# Altium PCB RPI Arduino Shied.PcbDoc
Units mm, origin at the board's own origin, x right, y up, seen from the top; angles counter-clockwise.
Board outline 65 x 60 mm, 2 copper layers (Top Layer, Bottom Layer); 6 components, 58 nets, 86 pads, 0 vias.
Unrouted connection lines stored in the file: 17.
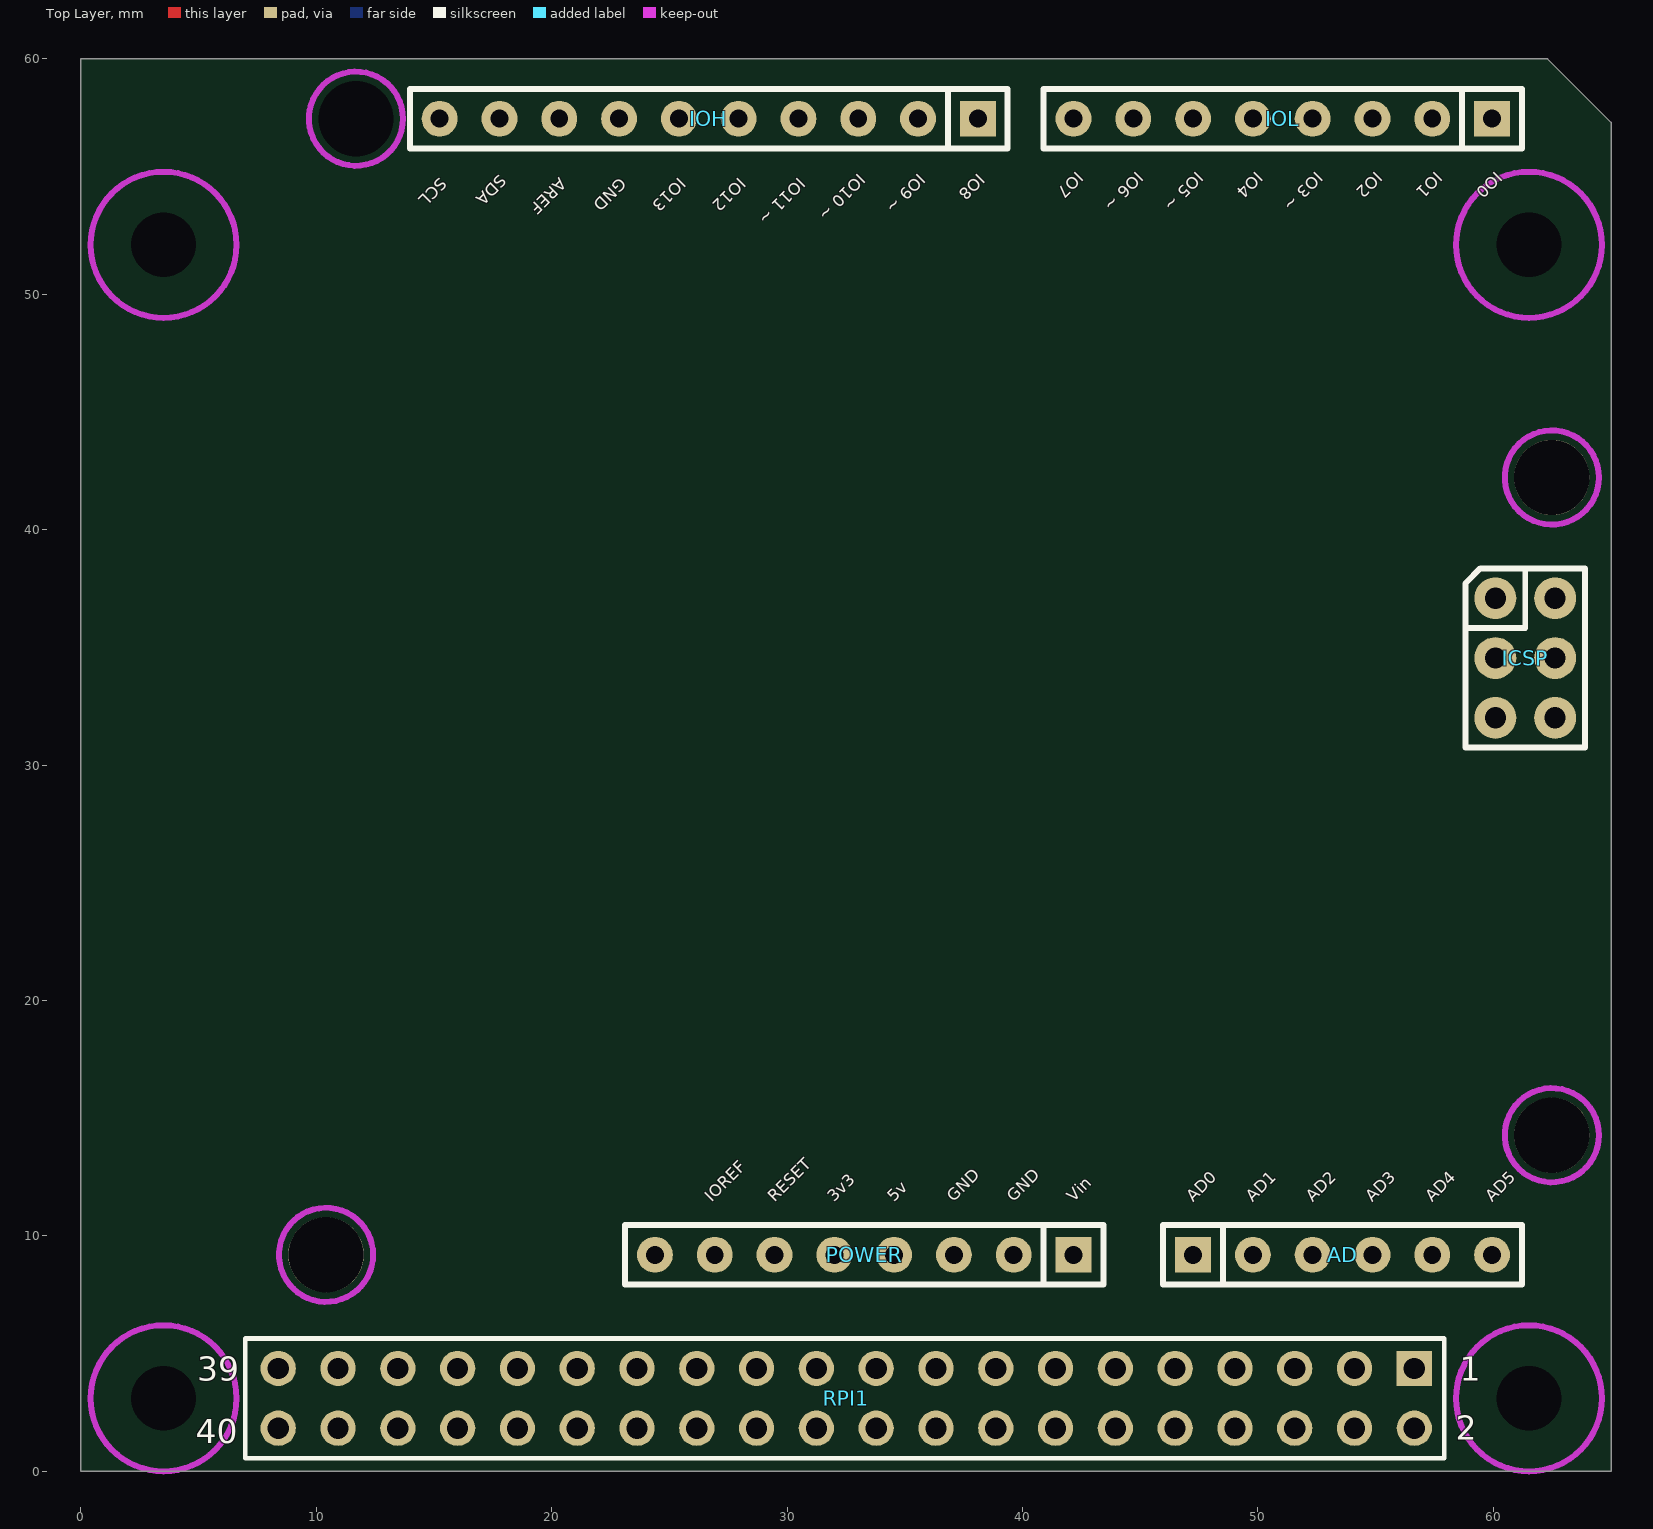
[diagram p0: Top Layer view]
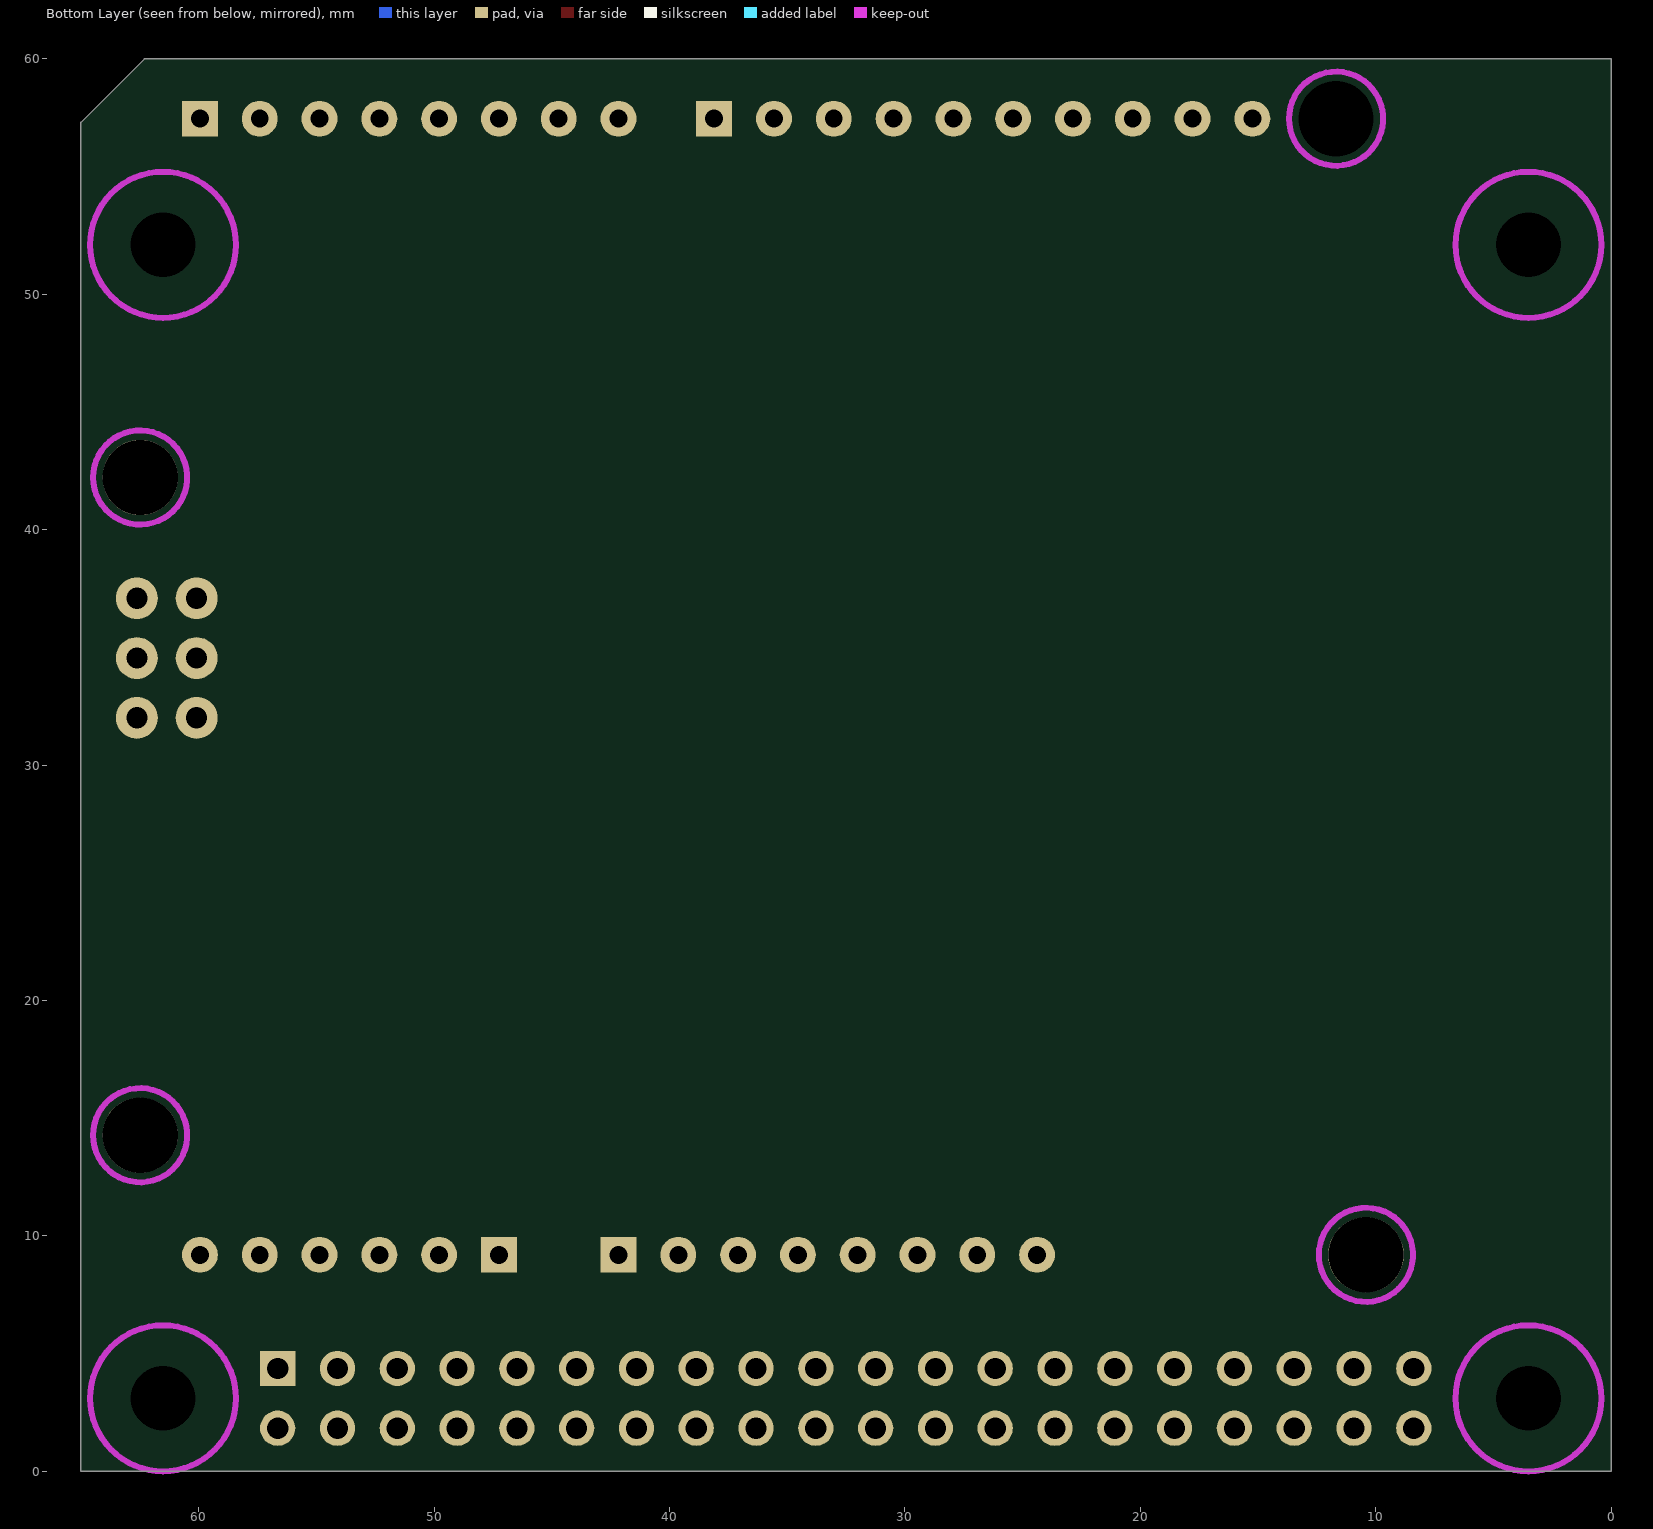
[diagram p1: Bottom Layer view, seen from below]

## Layer stack, top to bottom
Top Solder: solder mask 0.0102, Solder Resist, Dk 3.5
Top Layer: signal copper 0.0356
Dielectric 1: dielectric 0.32, FR-4, Dk 4.8
Bottom Layer: signal copper 0.0356
Bottom Solder: solder mask 0.0102, Solder Resist, Dk 3.5

## Board outline
0,0 65,0 65,57.301 62.301,60 0,60

## Design rules (kind name [scope] priority, off if disabled: settings)
Clearance [All] p1: gap=0.254 ignorepadtopadclearanceinfootprint=FALSE except(0: Arc-Hole Track-Hole SMDPad-Hole THPad-Hole Via-Hole Fill-Hole Poly-Hole Region-Hole Text-Hole)
PolygonConnect [All] p1: connectstyle=Relief reliefconductorwidth=0.254 reliefentries=4 polygonreliefangle="90 Angle" airgapwidth=0.254
RoutingVias [All] p1: holewidth=0.711 width=1.27 viastyle="Through Hole" minholewidth=0.711 minwidth=1.27 maxholewidth=0.711 maxwidth=1.27
SolderMaskExpansion [All] p1: expansion=0.102
Width [All] p1: maxlimit=0.254 minlimit=0.254 preferedwidth=0.254
30 further rules are at their usual default settings.

## Classes and differential pairs
component class U2: RPI1
component class U1: AD ICSP IOH IOL POWER

## Components (designator, comment, footprint, x,y, rotation, side; value= is the part's Value field where it differs from the comment)
AD "AD" "Header 6x1 8.5mm" 47.244,9.2 r0 top locked
ICSP "ICSP" ICSP 60.084,37.09 r0 top locked
IOH "IOH" "Header 10x1 8.5mm" 38.1,57.46 r180 top locked
IOL "IOL" "Header 8x1 8.5mm" 59.944,57.46 r180 top locked
POWER "POWER_UNO" "Header 8x1 8.5mm" 42.164,9.2 r180 top locked
RPI1 "RPI GPIO Connector" RPI 32.512,3.104 r0 top

## Footprints (in the part's own frame and the unit in brackets; to place one, negate y for a bottom-side part, rotate by r counter-clockwise, add the part's x,y. Pads: shape width x height; smd on the part's side, far side on the other; paste and mask are expansions set on the pad)
"Header 6x1 8.5mm" [mil] "Stackable 6 pin header"
  rect 60x60 hole 30: 1(0,0)
  round 60 hole 30: 2(100,0) 3(200,0) 4(300,0) 5(400,0) 6(500,0)
  silkscreen extent -50,-50 550,50, body extent -50,-50 550,50, height 335
"Header 8x1 8.5mm" [mil] "Stackable 8 pin header"
  rect 60x60 hole 30: 1(0,0)
  round 60 hole 30: 2(100,0) 3(200,0) 4(300,0) 5(400,0) 6(500,0) 7(600,0) 8(700,0)
  silkscreen extent -50,-50 750,50, body extent -50,-50 750,50, height 335
"Header 10x1 8.5mm" [mil] "Stackable 10 pin header"
  rect 60x60 hole 30: 1(0,0)
  round 60 hole 30: 2(100,0) 3(200,0) 4(300,0) 5(400,0) 6(500,0) 7(600,0) 8(700,0) 9(800,0) 10(900,0)
  silkscreen extent -50,-50 950,50, body extent -50,-50 950,50, height 335
ICSP [mil]
  round 70 hole 35.43: 1(0,0) 2(100,0) 3(0,-100) 4(100,-100) 5(0,-200) 6(100,-200)
  silkscreen extent -50,-250 150,50, body extent -50,-250 150,50, height 485
RPI [mm]
  rect 1.5x1.5 hole 0.9: 1(24.13,1.27)
  round 1.5 hole 0.9: 2(24.13,-1.27) 3(21.59,1.27) 4(21.59,-1.27) 5(19.05,1.27) 6(19.05,-1.27) 7(16.51,1.27) 8(16.51,-1.27) 9(13.97,1.27) 10(13.97,-1.27) 11(11.43,1.27) 12(11.43,-1.27) 13(8.89,1.27) 14(8.89,-1.27) 15(6.35,1.27) 16(6.35,-1.27) 17(3.81,1.27) 18(3.81,-1.27) 19(1.27,1.27) 20(1.27,-1.27) 21(-1.27,1.27) 22(-1.27,-1.27) 23(-3.81,1.27) 24(-3.81,-1.27) 25(-6.35,1.27) 26(-6.35,-1.27) 27(-8.89,1.27) 28(-8.89,-1.27) 29(-11.43,1.27) 30(-11.43,-1.27) 31(-13.97,1.27) 32(-13.97,-1.27) 33(-16.51,1.27) 34(-16.51,-1.27) 35(-19.05,1.27) 36(-19.05,-1.27) 37(-21.59,1.27) 38(-21.59,-1.27) 39(-24.13,1.27) 40(-24.13,-1.27)
  silkscreen extent -25.53,-2.54 25.4,2.54, body extent -25.52,-2.63 25.53,2.38, height 8.5

## Part data
AD: Supplier Part Number 1=2699089, Supplier 1=Arrow, Supplier 2=Digi-Key, Supplier 3=Arrow, Supplier 4=Arrow, Supplier Part Number 2=SAM1198-06-ND, Supplier Part Number 3=2699088, Supplier Part Number 4=2699075
ICSP: Supplier Part Number 1=2699117, Supplier 1=Arrow, Supplier 2=Arrow, Supplier 3=Digi-Key, Supplier 4=Arrow, Supplier 5=Digi-Key, Supplier Part Number 2=2699116, Supplier Part Number 3=SAM1185-06-ND, Supplier Part Number 4=2699091, Supplier Part Number 5=SAM1196-06-ND
IOH: Supplier Part Number 1=2698803S4475693N1004, Supplier 1=Arrow, Supplier 2=Digi-Key, Supplier 3=Arrow, Supplier Part Number 2=SAM1198-10-ND, Supplier Part Number 3=2698789
IOL POWER: Supplier Part Number 1=SAM1198-08-ND, Supplier 1=Digi-Key, Supplier 2=Arrow, Supplier 3=Arrow, Supplier 4=Arrow, Supplier Part Number 2=2698939, Supplier Part Number 3=2698940, Supplier Part Number 4=2698925
RPI1: library part "rpi connector", "GPIO Header for Raspberry Pi A+/B+/Pi 2/Pi 3 - 2x20", Manufacturer="SparkFun Electronics", Manufacturer Part Number=PRT-14017, Supplier Part Number 1=1568-1462-ND, Accessory Type=Connector, Category="Development Boards, Kits, Programmers", ComponentLink1Description=https://cdn.sparkfun.com/datasheets/Dev/RaspberryPi/12313.pdf, ComponentLink1URL=https://cdn.sparkfun.com/datasheets/Dev/RaspberryPi/12313.pdf, For Use With/Related Products="Raspberry Pi", Nils Minor=author, nilsminor@web.de=mail, Part Status=Active, Pricing 1="1=1.84 (EUR)", RoHS="RoHS Compliant", Stock 1=150, Supplier 1=Digi-Key

## Free pads (board coordinates)
  round 0 hole 2.75 unplated: ""(3.512,3.104) ""(3.512,52.104) ""(61.512,3.104) ""(61.512,52.104)
  round 3.2 hole 3.2: ""(10.414,9.2) ""(62.484,14.28) ""(62.484,42.22)
  round 0 hole 3.2 unplated: ""(11.684,57.46)

## Nets (pads, with @x,y where several pads share a name; then routed paths per layer and width w, separated by ;. In a path a pad name is that pad's centre, name@x,y a point inside that pad or via, vN(x,y) a via of type N, cw(c..) or ccw(c..) an arc to the next point about the centre after c; other vN are vias at no path point)
5V: ICSP.2 POWER.4 RPI1.2 RPI1.4
+3V3: POWER.5 RPI1.1 RPI1.17
AREF: IOH.8
GND: ICSP.6 IOH.7 POWER.2 POWER.3 RPI1.6 RPI1.9 RPI1.14 RPI1.20 RPI1.25 RPI1.30 RPI1.34 RPI1.39
IO0: IOL.1
IO1: IOL.2
IO2: IOL.3
IO3: IOL.4
IO4: IOL.5
IO5: IOL.6
IO6: IOL.7
IO7: IOL.8
IO8: IOH.1
IO9: IOH.2
IO10: IOH.3
IO11: IOH.4
IO12: IOH.5
IO13: IOH.6
MOSI: ICSP.4
NetAD_1: AD.1
NetAD_2: AD.2
NetAD_3: AD.3
NetAD_4: AD.4
NetAD_5: AD.5
NetAD_6: AD.6
NetICSP_1: ICSP.1
NetICSP_3: ICSP.3
NetPOWER_1: POWER.1
NetPOWER_7: POWER.7
NetRPI1_3: RPI1.3
NetRPI1_5: RPI1.5
NetRPI1_7: RPI1.7
NetRPI1_8: RPI1.8
NetRPI1_10: RPI1.10
NetRPI1_11: RPI1.11
NetRPI1_12: RPI1.12
NetRPI1_13: RPI1.13
NetRPI1_15: RPI1.15
NetRPI1_16: RPI1.16
NetRPI1_18: RPI1.18
NetRPI1_19: RPI1.19
NetRPI1_21: RPI1.21
NetRPI1_22: RPI1.22
NetRPI1_23: RPI1.23
NetRPI1_24: RPI1.24
NetRPI1_26: RPI1.26
NetRPI1_29: RPI1.29
NetRPI1_31: RPI1.31
NetRPI1_32: RPI1.32
NetRPI1_33: RPI1.33
NetRPI1_35: RPI1.35
NetRPI1_36: RPI1.36
NetRPI1_37: RPI1.37
NetRPI1_38: RPI1.38
NetRPI1_40: RPI1.40
R\E\S\E\T\: ICSP.5 POWER.6
SCL: IOH.10
SDA: IOH.9
pads on no net: POWER.8 RPI1.27 RPI1.28

## Keep-outs
Keep-Out Layer:
  circle w0.254: c10.414,9.2 r2
  circle w0.254: c62.484,14.28 r2
  circle w0.254: c62.484,42.22 r2
  circle w0.254: c11.684,57.46 r2
  circle w0.254: c3.512,52.104 r3.1
  circle w0.254: c3.512,3.104 r3.1
  circle w0.254: c61.512,52.104 r3.1
  circle w0.254: c61.512,3.104 r3.1

## Silkscreen, mask and mechanical layers (free items; w line width, h text height)
Top Overlay:
  text "IO7" at 42.291,55.248 h0.51 r225
  text "IO6 ~" at 44.831,55.248 h0.51 r225
  text "IO5 ~" at 47.371,55.248 h0.51 r225
  text "IO4" at 49.911,55.248 h0.51 r225
  text "IO3 ~" at 52.451,55.248 h0.51 r225
  text "IO2" at 54.991,55.248 h0.51 r225
  text "IO1" at 57.531,55.248 h0.51 r225
  text "IO0" at 60.071,55.248 h0.51 r225
  text "IO10 ~" at 33.02,55.174 h0.51 r225
  text "IO9 ~" at 35.56,55.174 h0.51 r225
  text "IO8" at 38.1,55.174 h0.51 r225
  text "SDA" at 17.78,55.121 h0.51 r225
  text "SCL" at 15.24,54.994 h0.51 r225
  text "AREF" at 20.32,54.994 h0.51 r225
  text "GND" at 22.86,54.994 h0.51 r225
  text "IO13" at 25.4,54.994 h0.51 r225
  text "IO12" at 27.94,54.994 h0.51 r225
  text "IO11 ~" at 30.48,54.994 h0.51 r225
  text "IOREF" at 26.797,11.412 h0.51 r45
  text "RESET" at 29.464,11.412 h0.51 r45
  text "3v3" at 32.004,11.412 h0.51 r45
  text "5v" at 34.544,11.412 h0.51 r45
  text "GND" at 37.084,11.412 h0.51 r45
  text "GND" at 39.624,11.412 h0.51 r45
  text "Vin" at 42.164,11.412 h0.51 r45
  text "AD0" at 47.244,11.412 h0.51 r45
  text "AD1" at 49.784,11.412 h0.51 r45
  text "AD2" at 52.324,11.412 h0.51 r45
  text "AD3" at 54.864,11.412 h0.51 r45
  text "AD4" at 57.404,11.412 h0.51 r45
  text "AD5" at 59.944,11.412 h0.51 r45
Mechanical 1:
  the board outline again, w0.127
Mechanical 16:
  lines w0.254: -108.077,-22.423 -102.997,-22.423 ; -108.077,25.837 -102.997,25.837 ; -108.077,74.097 -102.997,74.097 ; -35.052,-70.683 -35.052,-65.603 ; -35.052,117.277 -35.052,122.357 ; 29.083,-65.603 64.643,-65.603 ; 37.973,-70.683 37.973,-65.603 ; 37.973,117.277 37.973,122.357 ; 64.643,-57.983 178.943,-57.983 ; 64.643,-50.363 178.943,-50.363 ; 64.643,-42.743 102.743,-42.743 ; 102.743,-65.603 102.743,-50.363 102.743,-35.123 ; 110.998,-70.683 110.998,-65.603 ; 110.998,117.277 110.998,122.357 ; 156.083,-65.603 156.083,-50.363 ; 178.943,-22.423 184.023,-22.423 ; 178.943,25.837 184.023,25.837 ; 178.943,74.097 184.023,74.097 ; 64.643,-65.603 64.643,-35.123 102.743,-35.123 ; 64.643,-65.603 178.943,-65.603 ; 102.743,-35.123 178.943,-35.123 178.943,-65.603 ; 178.943,-65.603 178.943,117.277 -102.997,117.277 -102.997,-65.603 178.943,-65.603 ; -108.077,-70.683 -108.077,122.357 184.023,122.357 184.023,-70.683 -108.077,-70.683
  text "1" at -71.831,118.928 h1.78
  text "2" at 0.813,118.928 h1.78
  text "3" at 73.965,118.928 h1.78
  text "4" at 146.863,118.928 h1.78
  text "A" at -106.172,95.916 h1.78
  text "A" at 180.848,95.916 h1.78
  text "B" at -106.172,47.859 h1.78
  text "B" at 180.848,47.859 h1.78
  text "C" at -106.172,-0.655 h1.78
  text "C" at 180.848,-0.655 h1.78
  text "ENGINEER:" at 65.913,-37.663 h1.14
  text "TITLE:" at 104.013,-37.663 h1.14
  text "'.mProjectAuthor'" at 76.835,-40.076 h1.78
  text "'.mProjectName'" at 128.778,-43.505 h4
  text "PCB DESIGNER:" at 65.913,-45.156 h1.14
  text "D" at -106.172,-48.661 h1.78
  text "D" at 180.848,-48.661 h1.78
  text "DATE:" at 65.913,-52.903 h1.14
  text "PART NO.:" at 104.013,-52.903 h1.14
  text "REV:" at 157.353,-52.903 h1.14
  text "'.mProjectVersion'" at 162.052,-55.189 h1.78
  text ".PRINT_DATE" at 67.183,-55.951 h1.78
  text "FILE NAME:" at 65.913,-60.523 h1.14
  text "DWG NO:" at 104.013,-60.523 h1.14
  text "SCALE:" at 157.353,-60.523 h1.14
  text "'.mProjectRevision'" at 162.179,-63.317 h1.78
  text ".PCB_FILE_NAME_NO_PATH" at 67.183,-63.571 h1.78
  text "1" at -71.831,-69.032 h1.78
  text "2" at 0.813,-69.032 h1.78
  text "3" at 73.965,-69.032 h1.78
  text "4" at 146.863,-69.032 h1.78

## Text inside footprints (layer, text, board x,y; h text height)
RPI1: Top Overlay "40" at 4.887,1.204 h1.02; Top Overlay "39" at 4.937,3.854 h1.02; Top Overlay "1" at 58.562,3.854 h1.02; Top Overlay "2" at 58.412,1.354 h1.02